# Allegro board ANALYSIS_20170306_1.brd
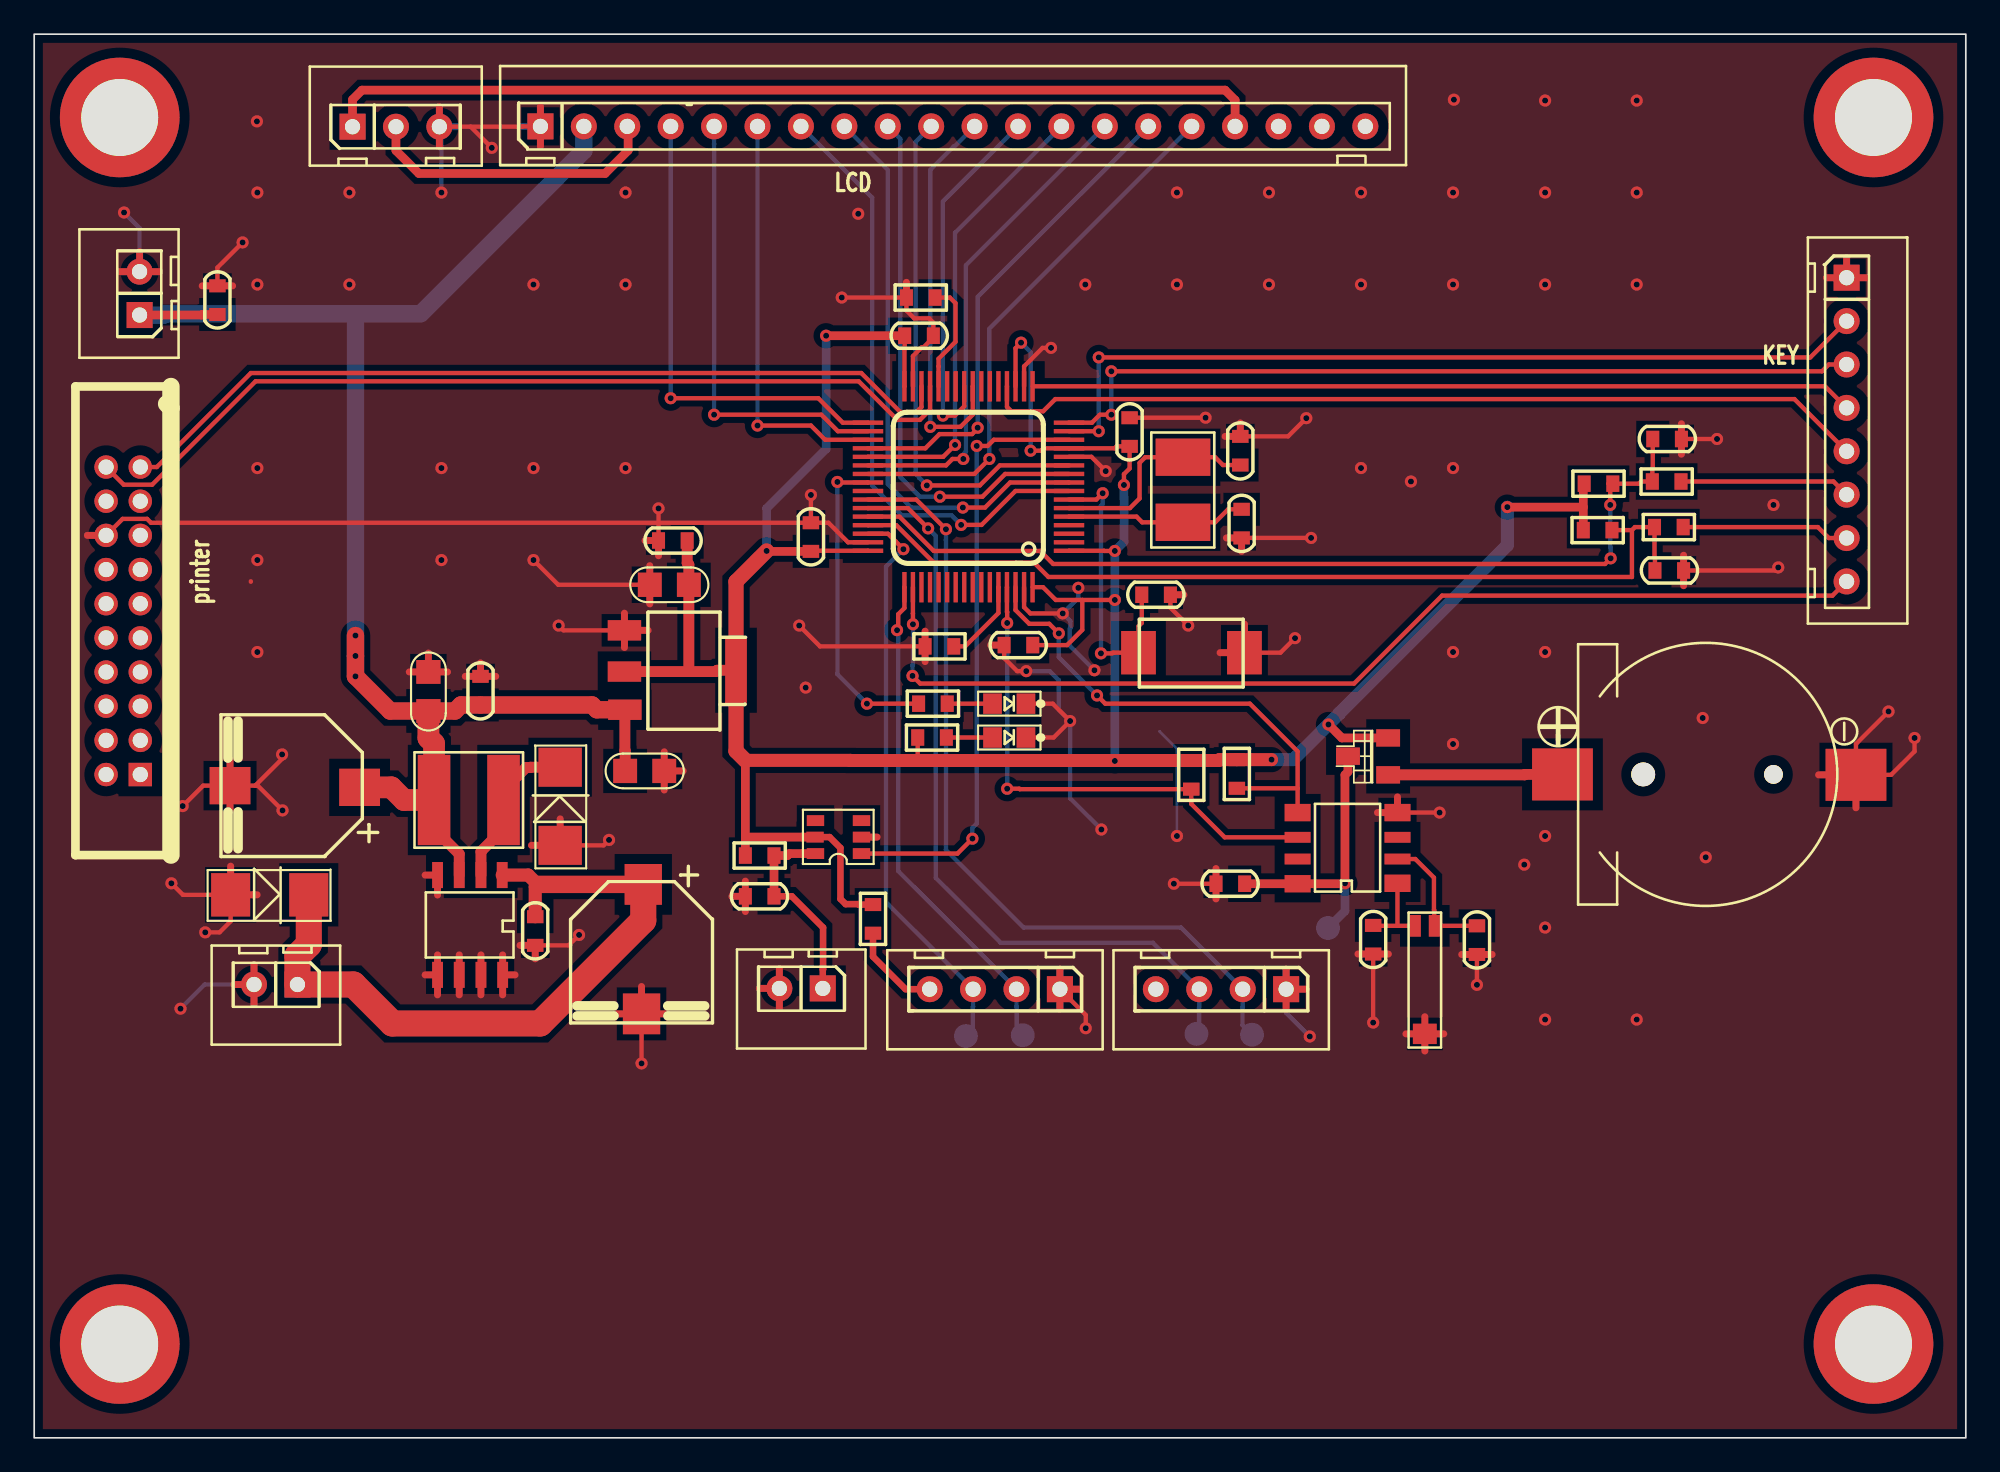
[diagram p0: board, top side]
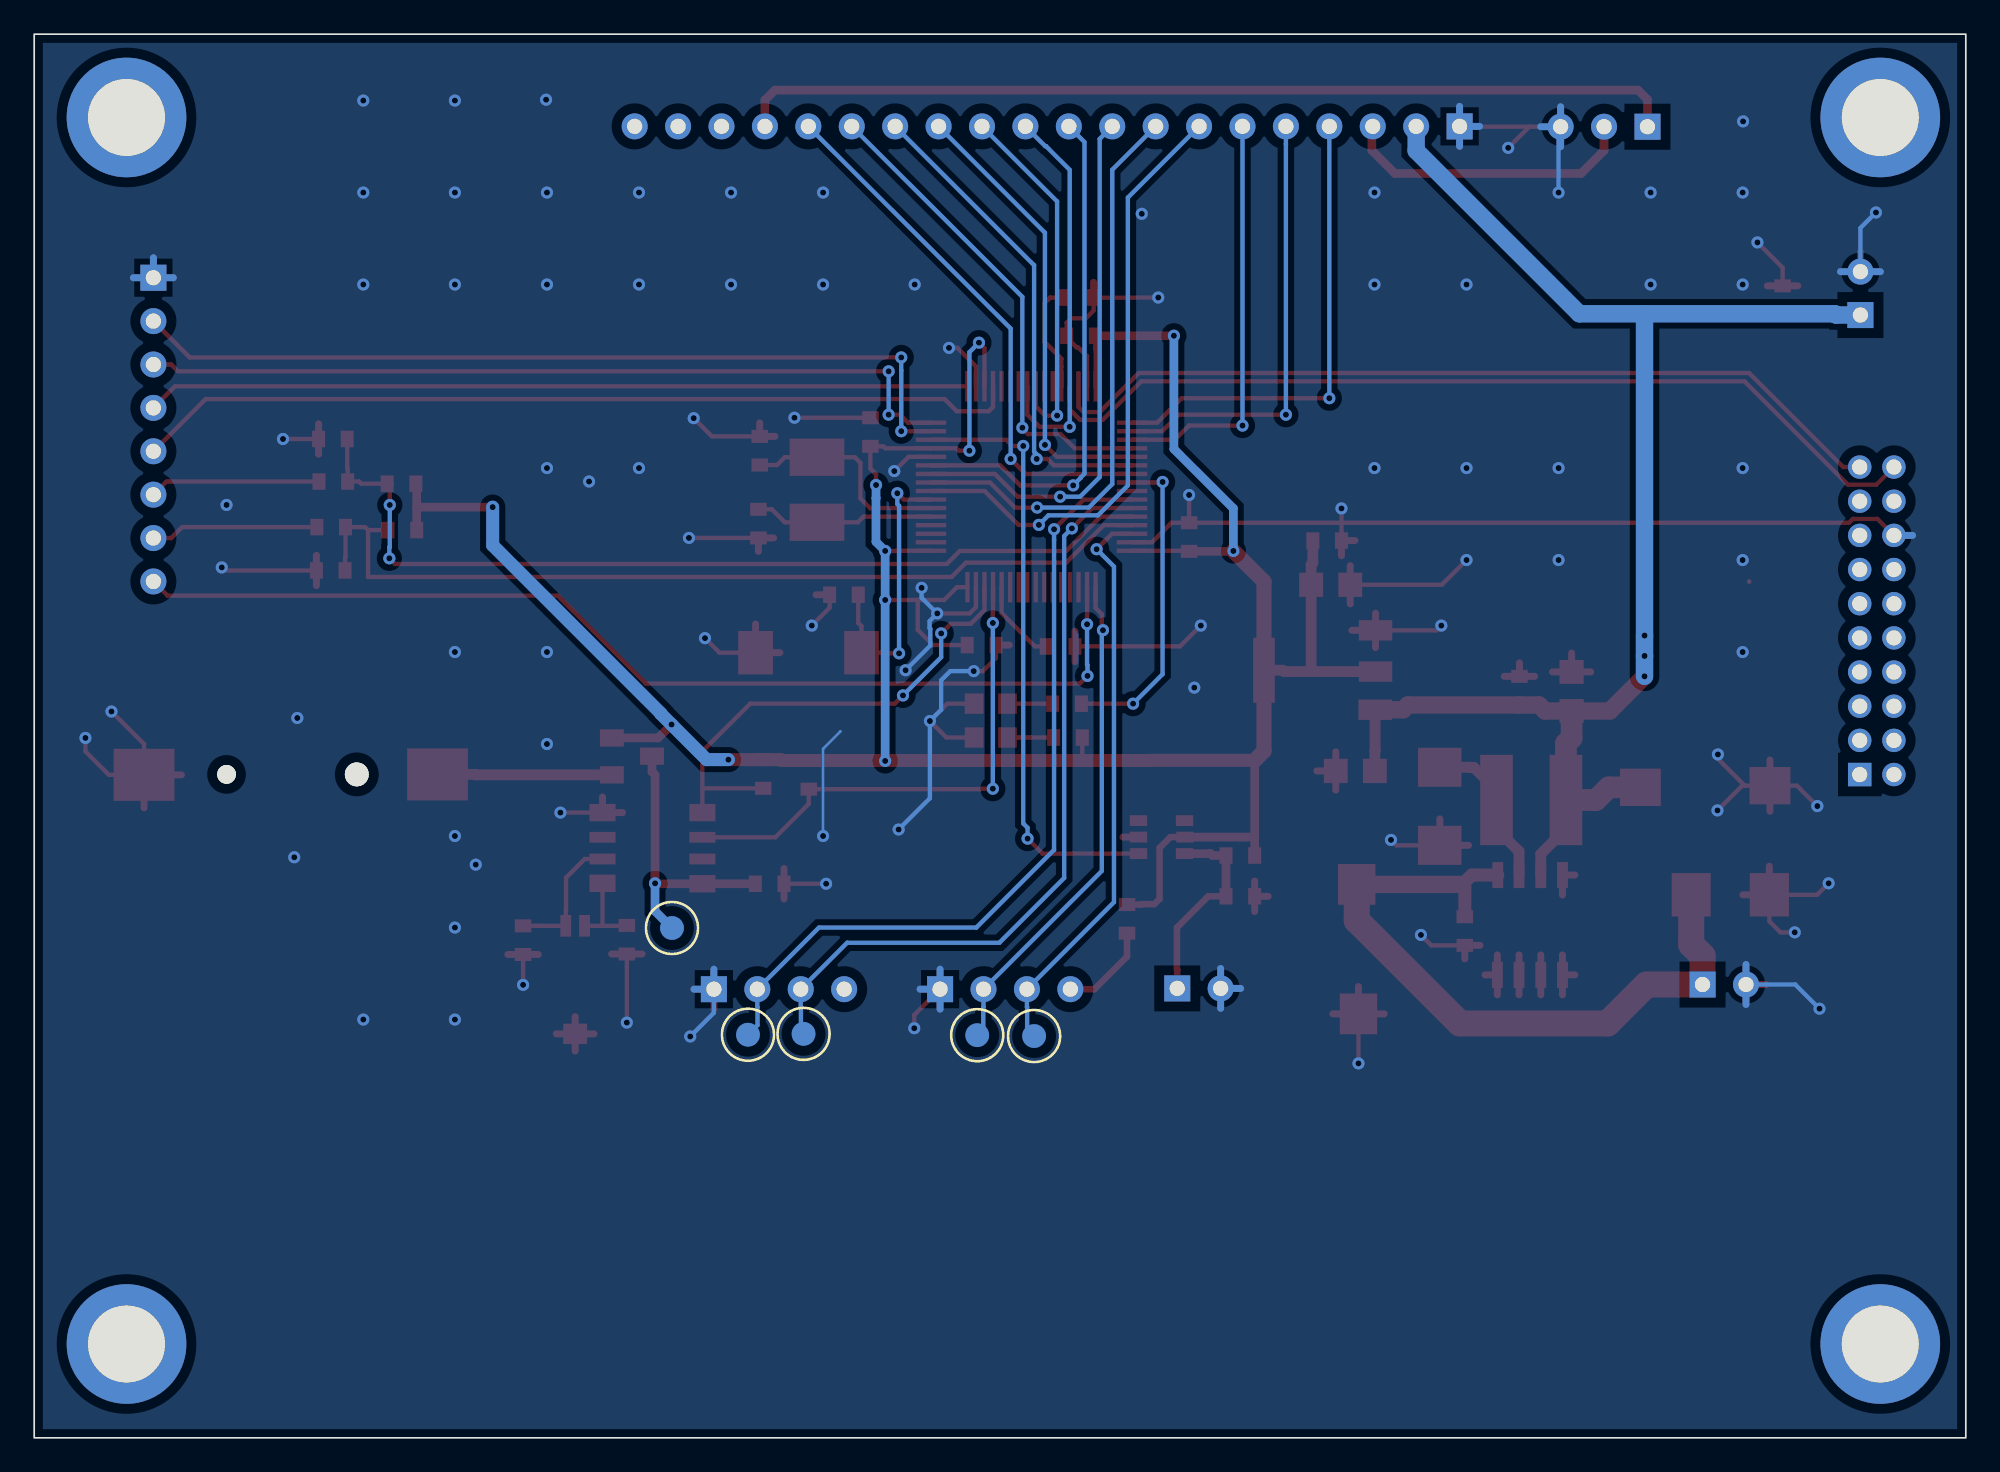
[diagram p1: board, bottom side, seen from below]

Outline 113 x 82.17 mm; copper layers: TOP, BOTTOM. Coordinates in mm from the lower left corner of the outline.
Outline path: rectangle 0,0 113,82.17

## Placement (name value [footprint] x y rotation side)
C1  0.1uF  [C0603]  51.77 64.52 0 top
C2  0.1uF  [C0603]  64.08 58.88 90 top
C3  0.1uF  [C0603]  45.44 52.73 90 top
C4  0.1uF  [C0603]  10.72 66.6 90 top
C5  0.1uF  [C0603]  42.44 31.7 180 top
C6  0.1uF  [C0603]  57.58 46.41 180 top
C7  15pF  [C0603]  70.56 57.78 270 top
C8  15pF  [C0603]  70.64 53.52 90 top
C9  0.1uF  [C0603]  65.63 49.35 180 top
C10  0.1uF  [C0603]  95.66 50.77 0 top
C11  0.1uF  [C0603]  95.53 58.47 0 top
C12  0.1uF  [C0603]  69.98 32.44 180 top
C13  5pF  [C0603]  84.4 29.13 90 top
C14  5pF  [C0603]  78.33 29.16 90 top
C15  220uf/35V  [CAP_SMD_8X10D5]  40.58 30.58 270 top
C16  0.1uF  [C0603]  29.31 29.67 90 top
C17  220uf/35V  [CAP_SMD_8X10D5]  17.22 33.13 180 top
C18  0.1uF  [C0603]  26.11 43.74 270 top
C19  10uF  [C0805]  23.06 43.69 270 top
C20  10uF  [C0805]  37.16 49.94 0 top
C21  10uF  [C0805]  35.72 39.04 180 top
C22  0.1uF  [C0603]  37.36 52.53 0 top
D1  BAT54C  [SOT23-3]  78.04 39.9 0 top
D2  SMBJ12A  [SMA]  13.78 31.79 180 top
D3  SS34  [SMA]  30.77 36.97 270 top
H1  NC/mechanical _pad  [HOLE_4D5MM]  5 5.49 0 top
H2  NC/mechanical _pad  [HOLE_4D5MM]  5 77.29 0 top
H3  NC/mechanical _pad  [HOLE_4D5MM]  107.6 77.29 0 top
H4  NC/mechanical _pad  [HOLE_4D5MM]  107.6 5.49 0 top
J3  -  [XH-2A]  6.17 65.73 90 top
J4  HEADER 20X2  [HEADER10X2_2MMP]  5.21 47.83 180 top
J5  HEADER 2  [XH-2A]  46.13 26.31 180 top
J8  HEADER 8  [XH-8A]  106.04 67.92 270 top
J9  LCD  [XH-20A]  32.56 63.52 0 top
JP_1  -  [XH-2A]  15.4 26.54 180 top
JP_SWD1  -  [XH-4A]  60.01 26.26 180 top
JS_BAT1  BAT  [CR1220_SOCKET_V1]  97.69 38.84 270 top
JS_USART1  NC/XH-4A  [XH-4A]  73.24 26.26 180 top
KS_REST  KEY_3x6x2d5_2p_SMD  [KEY_3X6X2D5_2P_SMD]  67.65 46.14 0 top
L1  47UH  [CD54]  25.43 37.34 90 top
LED0  LED  [LED0603]  57.05 41 180 top
LED1  LED  [LED0603]  57.05 42.98 180 top
NOREF  -  []  5 5.49 0 top
NOREF#2  -  []  107.6 5.49 90 top
NOREF#3  -  []  5 5.49 90 top
NOREF#4  -  []  5 77.29 0 top
R1  220K  [R0603]  42.44 34.09 180 top
R2  10K  [R0603]  91.47 53.14 180 top
R3  10K  [R0603]  91.52 55.85 180 top
R4  10K  [R0603]  52.96 46.33 0 top
R5  10K  [R0603]  51.87 66.75 0 top
R6  10K  [R0603]  95.5 55.98 180 top
R7  10K  [R0603]  95.63 53.31 180 top
R8  10R  [R0603]  49.07 30.38 90 top
R9  10k  [XH-3A]  18.62 76.75 0 top
R10  10K  [R0603]  67.69 38.81 270 top
R11  10K  [R0603]  70.36 38.86 270 top
R13  3.3K  [R0603]  52.53 41 180 top
R14  3.3K  [R0603]  52.58 42.98 180 top
T1  NC/TEST  [TEST_55C_SMD]  54.51 23.52 180 bottom
T2  NC/TEST  [TEST_55C_SMD]  57.84 23.57 180 bottom
T3  NC/TEST  [TEST_55C_SMD]  75.69 29.85 180 bottom
T4  NC/TEST  [TEST_55C_SMD]  68 23.65 180 bottom
T5  NC/TEST  [TEST_55C_SMD]  71.25 23.6 180 bottom
U1  USBLC6-2SC6  [SOT23-6]  47.05 35.17 90 top
U2  STM32F103RB  [LQFP64]  54.66 55.68 180 top
U3  PCF8563T  [SOP8]  79.5 32.61 90 top
U4  XL1509-5.0  [SOIC8]  25.5 30.02 180 top
U5  LM1117-3.3  [SOT-223]  34.58 44.93 270 top
Y1  8M  [CY5032_2P]  67.21 55.5 90 top
Y2  32.768KHz  [MC_146]  81.36 26.8 270 top

## Library data of the parts
C1-C22 = C
D1 = BAT54C
D2 D3 = DIODE
H1-H4 = PAD
J3 J5 = HEADER 2
J4 = HEADER 10X2_2
J8 = HEADER 10_0
J9 = HEADER 22_3
JP_1 = header_3d5_6
JP_SWD1 JS_USART1 = HEADER 4
JS_BAT1 = BATT
KS_REST = SW PUSHBUTTON_0
L1 = INDUCTOR_0
LED0 LED1 = LED0603
R1-R8 R10 R11 R13 R14 = R
R9 = R_var_0
T1-T5 = TESTPONT
U1 = USB_MINI_SOCKET_5
U2 = STM32F103
U3 = PCF8563
U4 = XL1509
U5 = 1117
Y1 = CRYSTAL
Y2 = MC_146

## Footprints (pads in the part's own frame, mm; a bottom-side part is the same pattern mirrored in y, then rotated)
C0603
  rect 0.762x0.965 smd: 1(-0.838,0) 2(0.838,0)
C0805
  rect 1.397x1.422 smd: 1(-1.143,0) 2(1.143,0)
CAP_SMD_8X10D5
  rect 2.388x2.184 smd: 1(-1.82,-4.95) 2(5.76,-5.05)
CD54
  rect 5.283x1.905 smd: 1(0,2.032) 2(0,-2.032)
CR1220_SOCKET_V1
  round 1.397 hole 1.397 unplated: (0,-3.556)
  rect 3.048x3.556 smd: 1(0,-8.28) 2(0.025,8.89)
  round 1.092 hole 1.092: 3(0,4.064)
CY5032_2P
  rect 2.184x3.2 smd: 1(-1.905,0) 2(1.905,0)
HEADER10X2_2MMP
  rect 1.372x1.372 hole 0.889: 1(-1,9)
  round 1.372 hole 0.889: 2(1,9) 3(-1,7) 4(1,7) 5(-1,5) 6(1,5) 7(-1,3) 8(1,3) 9(-1,1) 10(1,1) 11(-1,-1) 12(1,-1) 13(-1,-3) 14(1,-3) 15(-1,-5) 16(1,-5) 17(-1,-7) 18(1,-7) 19(-1,-9) 20(1,-9)
HOLE_4D5MM
  round 7 hole 4.5: 1(0,0)
KEY_3X6X2D5_2P_SMD
  rect 2.032x2.54 smd: 1(-3.048,-0.178) 2(3.15,-0.178)
LED0603
  rect 1.092x1.194 smd: 1(0.991,0) 2(-0.965,0)
LQFP64
  rect 1.778x0.254 smd: 1(-5.88,3.749) 2(-5.88,3.251) 3(-5.88,2.751) 4(-5.88,2.25) 5(-5.88,1.75) 6(-5.88,1.25) 7(-5.88,0.749) 8(-5.88,0.249) 9(-5.88,-0.249) 10(-5.88,-0.749) 11(-5.88,-1.25) 12(-5.88,-1.75) 13(-5.88,-2.25) 14(-5.88,-2.751) 15(-5.88,-3.251) 16(-5.88,-3.749) 33(5.88,-3.749) 34(5.88,-3.251) 35(5.88,-2.751) 36(5.88,-2.25) 37(5.88,-1.75) 38(5.88,-1.25) 39(5.88,-0.749) 40(5.88,-0.249) 41(5.88,0.249) 42(5.88,0.749) 43(5.88,1.25) 44(5.88,1.75) 45(5.88,2.25) 46(5.88,2.751) 47(5.88,3.251) 48(5.88,3.749)
  rect 0.254x1.778 smd: 17(-3.749,-5.88) 18(-3.251,-5.88) 19(-2.751,-5.88) 20(-2.25,-5.88) 21(-1.75,-5.88) 22(-1.25,-5.88) 23(-0.749,-5.88) 24(-0.249,-5.88) 25(0.249,-5.88) 26(0.749,-5.88) 27(1.25,-5.88) 28(1.75,-5.88) 29(2.25,-5.88) 30(2.751,-5.88) 31(3.251,-5.88) 32(3.749,-5.88) 49(3.749,5.88) 50(3.251,5.88) 51(2.751,5.88) 52(2.25,5.88) 53(1.75,5.88) 54(1.25,5.88) 55(0.749,5.88) 56(0.249,5.88) 57(-0.249,5.88) 58(-0.749,5.88) 59(-1.25,5.88) 60(-1.75,5.88) 61(-2.25,5.88) 62(-2.751,5.88) 63(-3.251,5.88) 64(-3.749,5.88)
MC_146
  rect 1.27x0.635 smd: 1(-3.173,0.55) 2(-3.173,-0.55)
  rect 1.194x1.397 smd: 3(3.15,0)
R0603
  rect 0.762x0.965 smd: 1(-0.838,0) 2(0.838,0)
SMA
  rect 2.286x2.54 smd: 1(2.286,0) 2(-2.286,0)
SOIC8
  rect 0.635x1.524 smd: 1(-1.88,-2.921) 2(-0.635,-2.921) 3(0.635,-2.921) 4(1.905,-2.921) 5(1.905,2.921) 6(0.635,2.921) 7(-0.635,2.921) 8(-1.905,2.921)
SOP8
  rect 1.016x1.524 smd: 1(-0.152,-0.254) 4(3.988,-0.254) 5(3.988,5.588) 8(-0.178,5.588)
  rect 0.635x1.524 smd: 2(1.27,-0.254) 3(2.54,-0.254) 6(2.54,5.588) 7(1.27,5.588)
SOT23-3
  rect 1.397x1.016 smd: 1(1.168,-1.092) 2(1.168,1.067) 3(-1.181,0)
SOT23-6
  rect 0.635x1.016 smd: 1(-0.965,-1.346) 2(0,-1.346) 3(0.965,-1.346) 4(0.965,1.346) 5(0,1.372) 6(-0.965,1.346)
SOT-223
  rect 1.194x1.956 smd: 1(-2.337,-0.051) 2(0.076,-0.051) 3(2.311,-0.025)
  rect 3.81x1.27 smd: 4(0,6.477)
TEST_55C_SMD
  round 1.397 smd: 1(0,0)
XH-2A
  rect 1.524x1.524 hole 0.889: 1(0,0)
  round 1.524 hole 0.889: 2(2.54,0)
XH-3A
  rect 1.524x1.524 hole 0.889: 1(0,0)
  round 1.524 hole 0.889: 2(2.54,0) 3(5.08,0)
XH-4A
  rect 1.524x1.524 hole 0.889: 1(0,0)
  round 1.524 hole 0.889: 2(2.54,0) 3(5.08,0) 4(7.62,0)
XH-8A
  rect 1.524x1.524 hole 0.889: 1(0.005,-0.013)
  round 1.524 hole 0.889: 2(2.545,-0.013) 3(5.085,-0.013) 4(7.625,-0.013) 5(10.165,-0.013) 6(12.705,-0.013) 7(15.245,-0.013) 8(17.785,-0.013)
XH-20A
  rect 1.524x1.524 hole 0.889: 1(-2.942,13.25)
  round 1.524 hole 0.889: 2(-0.402,13.25) 3(2.138,13.25) 4(4.678,13.25) 5(7.218,13.25) 6(9.758,13.25) 7(12.298,13.25) 8(14.838,13.25) 9(17.378,13.25) 10(19.918,13.25) 11(22.458,13.25) 12(24.998,13.25) 13(27.538,13.25) 14(30.078,13.25) 15(32.618,13.25) 16(35.158,13.25) 17(37.698,13.25) 18(40.238,13.25) 19(42.778,13.25) 20(45.318,13.25)

## Nets
GND: C1.2 C2.2 C3.2 C4.2 C5.2 C6.2 C7.1 C8.1 C9.1 C10.2 C11.2 C12.2 C13.1 C14.1 C15.2 C16.1 C17.2 C18.1 C19.1 C20.1 C21.1 C22.1 D2.1 D3.1 J3.2 J4.16(GND) J5.2 J8.1 J9.1(VSS) JP_1.2 JP_SWD1.1 JS_BAT1.2(-) JS_USART1.1 KS_REST.2 LED0.2(CATHODE) LED1.2(CATHODE) R4.1 R5.1 R9.3 U1.2(GND) U2.12(VSSA) U2.18(VSS_4) U2.31(VSS_1) U2.47(VSS_2) U2.63(VSS_3) U3.4(VSS) U4.4(EN) U4.5(GND1) U4.6(GND2) U4.7(GND3) U4.8(GND4) U5.1 Y2.3(GND)
VCC_5V: C4.1 C17.1 C18.2 C19.2 C21.2 J3.1 J9.2(VDD) L1.1 U4.3(FB) U5.3(IN)
VCC_9V: C15.1 C16.2 D2.2 JP_1.1 U4.1(VIN)
VDD_3V3: C1.1 C2.1 C3.1 C6.1 C20.2 C22.2 D1.2(C2) R1.2 R2.2 R3.2 R8.2 R10.1 R11.1 R13.2 U1.5(VBUS) U2.1(VBAT) U2.13(VDDA) U2.19(VDD_4) U2.32(VDD_1) U2.48(VDD_2) U2.64(VDD_3) U5.2(OUT) U5.4
/CS1: J9.15(CS) U2.36(PB15/TIM1_CH3N/SPI2_MOSI)
/RD: J9.6(RD) U2.35(PB14/TIM1_CH2N/SPI2_MISO)
/RST: J9.16(REST) U2.39(PC8/TIM3_CH3)
/WR: J9.5(WR) U2.34(PB13/TIM1_CH1N/SPI2_SCK)
BOOT0: R4.2 U2.60(BOOT0)
BOOT1: R5.2 U2.28(PB2/BOOT1)
DB0: J9.7(D0) U2.8(PC0/ADC12_IN10)
DB1: J9.8(D1) U2.9(PC1/ADC12_IN11)
DB2: J9.9(D2) U2.10(PC2/ADC12_IN12)
DB3: J9.10(D3) U2.11(PC3/ADC12_IN13)
DB4: J9.11(D4) U2.24(PC4/ADC12_IN14)
DB5: J9.12(D5) U2.25(PC5/ADC12_IN15)
DB6: J9.13(D6) U2.37(PC6/TIM3_CH1)
DB7: J9.14(D7) U2.38(PC7/TIM3_CH2)
EC11_A: C11.1 R3.1 R6.2 U2.44(PA11/USART1_CTS/CANRX/TIM1_CH4/)
EC11_B: C10.1 R2.1 R7.2 U2.45(PA12/USART1_RTS/CANTX/TIM1_ETR/)
EC11_C: J8.8 U2.50(PA15/JTDI/TIM2_CH1_ETR/SPI1_NSS)
I2C1_SCL: R10.2 U2.61(PB8/I2C1_SCL/CANRX) U3.6(SCL)
I2C1_SDA: R11.2 U2.62(PB9/I2C1_SDA/CANTX) U3.5(SDA)
KEY_1: J8.2 U2.15(PA1/USART2_RTS/ADC12_IN1/TIM2_C)
KEY_2: J8.3 U2.16(PA2/USART2_TX/ADC12_IN2/TIM2_CH)
KEY_3: J8.4 U2.17(PA3/USART2_RX/ADC12_IN3/TIM2_CH)
KEY_4: J8.5 U2.20(PA4/SPI1_NSS/USART2_CK/ADC12_IN)
PC9_LED0: R14.2 U2.40(PC9/TIM3_CH4)
RS: J9.4(A0) U2.33(PB12/TIM1_BKIN/SPI2_NSS)
STM32_REST: C9.2 KS_REST.1 U2.7(NRST)
SWCLK: JP_SWD1.2 T2.1 U2.49(PA14/JTCK/SWCLK)
SWDIO: JP_SWD1.3 T1.1 U2.46(PA13/JTMS/SWDIO)
USART1_RX_PA10: JS_USART1.3 T4.1 U2.43(PA10/USART1_RX/TIM1_CH3)
USART1_TX_PA9: JS_USART1.2 T5.1 U2.42(PA9/USART1_TX/TIM1_CH2)
USART3_RXD: J4.19(TXD) U2.30(PB11/TIM2_CH4/USART3_RX)
USART3_TXD: J4.20(RXD) U2.29(PB10/TIM2_CH3/USART3_TX)
N201627: C12.1 D1.3(A) T3.1 U3.8(VDD)
N201649: C14.2 U3.1(OSCI) Y2.2
N202031: JP_SWD1.4 R8.1
N202175: C7.2 U2.6(PD1 OSC_OUT/CANTX) Y1.2
N202187: C8.2 U2.5(PD0 OSC_IN/CANRX) Y1.1
N202733: D1.1(C1) JS_BAT1.1(+)
N203157: C13.2 U3.2(OSCO) Y2.1
N208876: D3.2 L1.2 U4.2(OUTPUT)
N211508: U1.1(I/O1) U2.14(PA0-WKUP/USART2_CTS/ADC12_IN0/T)
N214712: C5.1 J5.1 R1.1 U1.6(I/O1X)
N217465: J8.7 R7.1
N217476: J8.6 R6.1
N261648: J9.17(VEE) R9.1
N261718: J9.3(V0) R9.2
N265241: LED1.1(ANODE) R14.1
N2654610: LED0.1(ANODE) R13.1

Pads without a net: H1 1; H2 1; H3 1; H4 1; J4 1 2 3 4 5 6 7 8 9 10 11 12 13 14 15 17 18; J9 18 19 20; JS_BAT1 3; JS_USART1 4; U1 3 4; U2 2 3 4 21 22 23 26 27 41 51 52 53 54 55 56 57 58 59; U3 3 7

## Via types
v1: diameter 0.711, hole 0.356, TOP to BOTTOM, 140 vias

## Routing (per net, layer and track width the routed paths; a pad name or vN(x,y) marks a point on that pad's centre or on a via; arc(x,y) is an arc through that point)
GND: length 354.7
  TOP w0.254: v1(44.75,47.55) 45.97,46.33 R4.1 ; C22.1 v1(36.53,54.41) ; J9.1 28.57,76.77 28.56,76.75 25.53,76.75 ; v1(108.48,42.52) 106.58,40.61 JS_BAT1.2 108.64,38.81 110.01,40.18 v1(110.01,40.97) ; C6.2 56.74,45.64 57.51,44.88 v1(58.04,44.88) ; v1(102.03,50.95) 101.85,50.77 C10.2 ; v1(61.52,23.98) 61.52,24.75 JP_SWD1.1 ; LED1.2 59.59,42.98 v1(60.6,41.96) ; C9.1 66.47,48.59 v1(67.51,47.55) ; J4.16 5.17,53.79 6.61,53.79 6.83,53.57 C3.2 ; C15.2 v1(35.53,21.92) ; v1(60.17,48.26) 58.28,48.26 57.91,48.63 U2.63 ; C3.2 46.47,53.57 47.61,52.42 U2.47 ; C3.2 v1(45.44,55.19) ; U5.1 30.96,47.27 v1(30.68,47.55) ; v1(59.49,63.8) 58.99,63.8 57.91,62.72 U2.18 ; C16.1 31.27,28.83 v1(31.88,29.44) ; v1(8.69,36.98) 9.88,38.18 C17.2 12.93,38.18 ; v1(62.69,56.59) 61.85,57.43 U2.12 ; 12.93,38.18 13.08,38.18 v1(14.53,36.73) ; 12.93,38.18 14.5,39.75 v1(14.5,40) ; LED0.2 59.64,41 v1(60.6,41.96) ; v1(73.76,46.81) 72.91,45.96 KS_REST.2 ; v1(29.21,51.38) 30.66,49.94 C20.1 ; 12.67,50.14 12.67,50.11 ; v1(8.03,32.46) 8.7,31.79 D2.1 11.49,30.24 10.85,29.59 v1(10.01,29.59) ; D3.1 33.31,34.68 v1(33.63,35) ; v1(60.6,41.96) 60.63,41.96 ; 25.53,76.75 v1(26.77,75.51) ; 25.53,76.75 R9.3 ; C8.1 v1(74.7,52.68) ; C11.2 v1(98.45,58.47) ; C14.1 v1(78.33,24.31) ; C2.2 v1(68.53,59.72) ; C7.1 73.36,58.62 v1(74.42,59.69) ; v1(12.19,69.98) 10.72,68.5 C4.2 ; C13.1 v1(84.4,26.52) ; C12.2 v1(66.67,32.44) ; U3.4 v1(82.22,36.6) ; U2.31 51.41,63.32 51.92,63.84 52.02,63.84 52.6,64.41 C1.2 52.6,65.28 52.35,65.53 51.49,65.53 51.03,65.99 R5.1 v1(47.24,66.75)
  TOP w0.406: 36.53,51.64 C22.1 35.74,52.53 ; 29.62,75.6 J9.1 29.62,77.94 ; 23.6,25.93 U4.5 ; U4.5 22.87,27.1 ; U4.5 23.6,28.27 ; 104.86,67.91 J8.1 ; J8.1 107.2,67.91 ; J8.1 106.03,69.08 ; 12.86,25.37 JP_1.2 ; JP_1.2 11.69,26.54 ; JP_1.2 12.86,27.71 ; 79.76,37.52 U3.4 78.59,36.6 ; 69.67,58.62 C7.1 70.56,59.41 ; 23.7,75.58 R9.3 23.7,77.92 ; C15.2 37.03,24.82 ; C15.2 35.53,26.42 ; C15.2 34.03,24.82 ; 69.14,31.55 C12.2 69.14,33.32 ; J3.2 6.17,69.44 ; J3.2 7.33,68.27 ; J3.2 5,68.27 ; 3.11,52.83 J4.16 ; 52.12,47.22 R4.1 52.12,45.44 ; 96.37,57.58 C11.2 96.37,59.36 ; 69.75,52.68 C8.1 70.64,51.89 ; C21.1 37.96,39.04 ; C21.1 36.86,37.92 ; C21.1 36.86,40.16 ; 25.22,44.58 C18.1 ; C18.1 27,44.58 ; C18.1 26.11,45.36 ; 69.38,45.96 KS_REST.2 70.8,47.64 ; JS_USART1.1 74.41,26.26 ; JS_USART1.1 73.24,25.1 ; JS_USART1.1 73.24,27.43 ; 23.6,31.78 U4.4 22.87,32.94 ; Y2.3 82.46,23.65 ; Y2.3 81.36,22.64 ; Y2.3 80.25,23.65 ; Y2.3 81.36,24.65 ; 83.52,28.3 C13.1 85.29,28.3 ; 11.46,39.68 C17.2 11.46,36.68 ; 96.49,49.89 C10.2 96.49,51.66 ; U1.2 49.31,35.17 ; 40.82,31.7 C5.2 ; C5.2 41.61,32.59 ; C5.2 41.61,30.81 ; C9.1 67.26,49.35 ; 11.61,67.44 C4.2 9.83,67.44 ; JP_SWD1.1 61.18,26.26 ; JP_SWD1.1 60.01,25.1 ; JP_SWD1.1 60.01,27.43 ; 28.42,28.83 C16.1 29.31,28.04 ; 26.14,25.93 U4.7 26.14,28.27 ; 106.58,36.88 JS_BAT1.2 104.39,38.81 ; 34.53,46.27 U5.1 ; U5.1 35.92,47.27 ; U5.1 34.53,48.27 ; 24.87,28.27 U4.6 24.87,25.93 ; U4.8 28.13,27.1 ; U4.8 27.41,28.27 ; U4.8 27.41,25.93 ; 36.01,51.05 C20.1 36.01,48.82 ; R5.1 51.03,67.64 ; 42.43,26.31 J5.2 ; J5.2 43.59,27.48 ; J5.2 43.59,25.14 ; 21.95,44.83 C19.1 ; C19.1 23.06,45.94 ; C19.1 24.18,44.83 ; 11.49,33.46 D2.1 13.04,31.79 ; 79.22,28.32 C14.1 77.44,28.32 ; 30.77,36.23 D3.1 29.1,34.68 ; 55.96,46.41 C6.2
  BOTTOM w0.152: 65.86,41.35 65.84,41.35 66.85,40.34 v1(66.85,35.23)
  BOTTOM w0.254: v1(5.26,71.73) 6.17,70.82 J3.2 ; v1(23.83,72.9) 23.83,76.63 R9.3 ; v1(62.43,35.61) 60.6,37.44 v1(60.6,41.96) 59.94,42.62 59.94,44.35 59.41,44.88 v1(58.04,44.88) ; JP_1.2 9.98,26.54 v1(8.56,25.12) ; v1(62.03,44.93) 60.58,46.38 60.58,47.35 60.62,47.4 60.62,47.81 v1(60.17,48.26) 61.09,49.17 v1(61.09,49.76) ; JS_USART1.1 73.24,24.88 v1(74.63,23.5)
  BOTTOM w0.406: R9.3 24.87,76.75 ; R9.3 23.7,75.58 ; R9.3 23.7,77.92 ; J8.1 106.03,69.08 ; J8.1 104.86,67.91 ; J8.1 107.2,67.91 ; 5,68.27 J3.2 7.33,68.27 ; 42.43,26.31 J5.2 ; J5.2 43.59,27.48 ; J5.2 43.59,25.14 ; 3.11,52.83 J4.16 ; 60.01,25.1 JP_SWD1.1 ; JP_SWD1.1 60.01,27.43 ; JP_SWD1.1 61.18,26.26 ; 28.45,76.77 J9.1 ; J9.1 29.62,75.6 ; J9.1 29.62,77.94 ; 12.86,25.37 JP_1.2 12.86,27.71 ; 74.41,26.26 JS_USART1.1 73.24,27.43
  vias: v1(13.03,77.06) v1(13.06,72.9) v1(13.06,67.51) v1(13.06,56.77) v1(13.06,51.38) v1(13.06,46) v1(18.44,72.9) v1(18.44,67.51) v1(23.83,56.77) v1(23.83,51.38) v1(29.21,67.51) v1(29.21,56.77) v1(34.59,72.9) v1(34.59,67.51) v1(34.59,56.77) v1(45.14,43.92) v1(48.21,71.65) v1(61.49,67.51) v1(66.85,72.9) v1(66.85,67.51) v1(72.24,72.9) v1(72.24,67.51) v1(77.62,72.9) v1(77.62,67.51) v1(77.62,56.77) v1(80.54,55.98) v1(83.01,72.9) v1(83.01,67.51) v1(83.01,56.77) v1(83.01,46) v1(83.01,40.61) v1(83.06,78.33) v1(87.17,33.55) v1(88.39,78.28) v1(88.39,72.9) v1(88.39,67.51) v1(88.39,46) v1(88.39,35.23) v1(88.39,29.87) v1(88.39,24.49) v1(93.75,78.28) v1(93.75,72.9) v1(93.75,67.51) v1(93.75,24.49) v1(97.61,42.14) v1(97.79,33.99) v1(101.75,54.61)
VCC_5V: length 95
  TOP w0.508: J3.1 9.8,65.73 9.83,65.76 C4.1
  TOP w0.635: L1.1 23.39,35.65 24.87,34.18 U4.3 ; U5.3 34.56,40.24 34.57,40.22 C21.2
  TOP w1.016: U5.3 32.92,42.62 32.64,42.9 C18.2 24.97,42.9 24.62,42.55 C19.2 20.82,42.55 v1(18.8,44.58) v1(18.8,45.77) v1(18.8,46.96)
  TOP w1.27: C19.2 23.06,40.97 23.39,40.64 L1.1 21.63,37.34 20.89,38.08 C17.1
  BOTTOM w1.016: 18.8,65.8 22.61,65.8 32.16,75.35 J9.2 ; 18.8,65.8 7.66,65.8 7.59,65.73 J3.1 ; 18.8,65.8 v1(18.8,46.96) v1(18.8,45.77) v1(18.8,44.58)
VCC_9V: length 41.7
  TOP w0.762: C16.2 29.31,32.26 29.45,32.4 28.91,32.94 U4.1
  TOP w1.016: C15.1 29.45,32.4
  TOP w1.524: C15.1 35.63,30.29 29.6,24.26 20.95,24.26 18.67,26.54 JP_1.1 15.4,28.21 16.07,28.88 D2.2
VDD_3V3: length 182.7
  TOP w0.254: U2.1 62.58,51.93 62.59,51.92 v1(63.22,51.92) ; U2.64 59.02,49.8 59.77,49.05 61.32,49.05 ; 63.22,39.65 v1(63.22,39.62) ; v1(63.75,55.78) 63.75,56.41 64.08,56.74 C2.1 63.32,58.04 63.21,57.93 U2.13 59.07,57.93 58.93,57.78 v1(58.29,57.78) ; C1.1 50.93,63.75 50.91,63.74 50.91,61.56 U2.32 ; v1(63.22,49.05) 61.32,49.05 ; 61.32,49.05 61.32,47.29 60.43,46.41 C6.1 ; R13.2 51.69,39.65 ; U2.48 45.44,51.93 C3.1 ; v1(57.73,64.11) 57.41,63.79 U2.19
  TOP w0.381: U1.5 46.53,35.17 47.17,34.53 47.17,31.55 47.47,31.24 48.22,31.24 48.25,31.22 R8.2
  TOP w0.508: C3.1 42.87,51.89 v1(42.85,51.92) ; 41.61,35.18 R1.2 ; 41.61,35.18 41.61,39.66 ; 41.61,35.18 41.62,35.17 U1.5 ; v1(75.72,41.76) 76.5,40.97 D1.2 ; R3.2 90.63,55.8 90.63,54.48 ; 90.63,54.48 R2.2 ; 90.63,54.48 v1(86.18,54.48) ; C1.1 v1(46.33,64.52)
  TOP w0.635: U5.4 39.95,44.93 39.88,44.86 38.2,44.86 ; C22.2 38.2,51.22 38.3,51.12 C20.2 38.3,44.95 38.2,44.86 ; U5.2 38.2,44.86
  TOP w0.762: v1(72.39,39.7) R11.1 69.34,39.7 69.29,39.65 R10.1 47.76,39.65 47.75,39.66 41.61,39.66
  TOP w0.889: 41.61,39.66 41.06,40.2 U5.4 41.06,50.13 v1(42.85,51.92)
  BOTTOM w0.254: v1(58.29,57.78) 58.29,63.55 v1(57.73,64.11)
  BOTTOM w0.508: v1(46.33,64.52) 46.33,57.89 42.85,54.41 v1(42.85,51.92) ; v1(63.75,55.78) 63.75,55.02 63.76,55.01 63.76,52.46 v1(63.22,51.92) v1(63.22,49.05) v1(63.22,39.62)
  BOTTOM w0.762: v1(72.39,39.7) 73.66,39.7 v1(75.72,41.76) 76.35,42.39 76.35,42.41 86.18,52.25 v1(86.18,54.48)
/CS1: length 28.7
  TOP w0.254: v1(55.19,59.13) 55.19,59.08 54.87,58.76 52.97,58.76 52.13,57.93 U2.36
  BOTTOM w0.254: J9.15 55.19,66.79 v1(55.19,59.13)
/RD: length 24.3
  TOP w0.254: v1(42.32,59.26) 45.44,59.26 46.27,58.43 U2.35
  BOTTOM w0.254: J9.6 v1(42.32,59.26)
/RST: length 31.8
  TOP w0.254: U2.39 55,56.42 v1(55.88,57.3)
  BOTTOM w0.254: J9.16 55.88,64.93 v1(55.88,57.3)
/WR: length 26.3
  TOP w0.254: v1(39.78,59.89) 46.05,59.89 47.02,58.93 U2.34
  BOTTOM w0.254: J9.5 39.78,75.73 v1(39.78,59.89)
BOOT0: length 4.9
  TOP w0.254: R4.2 54.46,46.33 56.41,48.28 U2.60
BOOT1: length 6.6
  TOP w0.254: R5.2 53.57,66.75 53.9,66.42 53.9,64.16 52.91,63.17 52.91,62.72 52.91,62.72 U2.28
DB0: length 36
  TOP w0.254: v1(54.23,53.44) 55.42,53.44 57.41,55.43 U2.8
  BOTTOM w0.254: v1(54.23,53.44) 53.67,54 50.77,54 49.02,55.75 49.02,72.6 J9.7
DB1: length 33.8
  TOP w0.254: v1(54.33,54.46) 55.63,54.46 57.09,55.92 U2.9
  BOTTOM w0.254: J9.8 49.94,74.23 49.94,55.83 51.31,54.46 v1(54.33,54.46)
DB2: length 31.7
  TOP w0.254: v1(52.98,55.09) 55.47,55.09 56.81,56.42 U2.10
  BOTTOM w0.254: J9.9 50.67,76.03 50.67,56.24 51.82,55.09 v1(52.98,55.09)
DB3: length 30.5
  TOP w0.254: v1(52.22,55.75) 55.32,55.75 56.49,56.93 U2.11
  BOTTOM w0.254: J9.10 51.56,75.86 51.56,56.44 51.77,56.23 51.77,56.2 v1(52.22,55.75)
DB4: length 23.1
  TOP w0.254: U2.24 54.91,59.9 54.19,59.18 v1(52.43,59.18)
  BOTTOM w0.254: J9.11 53.86,75.62 53.81,75.62 52.43,74.23 v1(52.43,59.18)
DB5: length 21.4
  TOP w0.254: U2.25 54.41,60.39 53.87,59.84 v1(53.16,59.84)
  BOTTOM w0.254: J9.12 53.16,72.38 v1(53.16,59.84)
DB6: length 26.6
  TOP w0.254: U2.37 53.18,57.43 v1(53.87,58.12)
  BOTTOM w0.254: J9.13 53.87,70.55 v1(53.87,58.12)
DB7: length 28.6
  TOP w0.254: v1(54.36,57.3) 53.72,57.3 53.34,56.93 U2.38
  BOTTOM w0.254: v1(54.36,57.3) 54.39,57.33 54.39,57.6 54.51,57.73 54.51,68.64 J9.14
EC11_A: length 54.3
  TOP w0.254: v1(92.2,54.61) 92.2,55.75 92.1,55.85 R3.1 93.88,55.85 94.01,55.98 R6.2 94.67,56.74 94.69,56.77 C11.1 ; U2.44 50.62,53.93 52.63,51.92 58.85,51.92 59.61,51.16 91.9,51.16 v1(92.23,51.49)
  BOTTOM w0.254: v1(92.23,51.49) 92.23,52.12 92.2,52.15 v1(92.2,54.61)
EC11_B: length 53.8
  TOP w0.254: C10.1 94.82,51.54 94.79,51.56 R7.2 93.65,53.31 93.47,53.14 ; 93.47,53.14 R2.1 ; 93.47,53.14 93.47,50.4 93.47,50.39 59.33,50.39 58.5,51.23 52.63,51.23 50.44,53.43 U2.45
EC11_C: length 62.5
  TOP w0.254: U2.50 51.41,48.26 51.41,48.26 v1(51.41,47.62) ; v1(51.38,44.6) 51.83,44.15 77.22,44.15 82.36,49.3 105.2,49.3 J8.8
  BOTTOM w0.254: v1(51.38,44.6) 51.38,45.24 51.41,45.26 v1(51.41,47.62)
I2C1_SCL: length 30.5
  TOP w0.254: v1(56.92,38) 57.63,38 57.66,37.97 R10.2 67.69,37.11 69.65,35.15 U3.6 ; v1(56.92,47.7) 56.92,48.34 56.91,48.35 U2.61
  BOTTOM w0.254: v1(56.92,47.7) v1(56.92,38)
I2C1_SDA: length 29.2
  TOP w0.254: U2.62 57.41,48.46 58.22,47.65 59.39,47.65 v1(59.94,47.09) ; v1(62.18,43.46) 62.66,42.98 71.12,42.98 73.91,40.18 73.91,38.02 ; U3.5 73.91,38.02 ; 73.91,38.02 R11.2
  BOTTOM w0.254: v1(59.94,47.09) 59.94,45.69 v1(62.18,43.46)
KEY_1: length 50.7
  TOP w0.254: J8.2 103.91,63.25 v1(62.28,63.25) ; U2.15 v1(62.28,58.93)
  BOTTOM w0.254: v1(62.28,58.93) 62.28,62.49 62.28,62.49 v1(62.28,63.25)
KEY_2: length 48.4
  TOP w0.254: v1(63.02,62.43) 104.59,62.43 104.99,62.83 J8.3 ; v1(63.02,59.89) 62.35,59.89 61.88,59.42 U2.16
  BOTTOM w0.254: v1(63.02,59.89) v1(63.02,62.43)
KEY_3: length 48.1
  TOP w0.254: U2.17 104.77,61.56 J8.4
KEY_4: length 52
  TOP w0.254: J8.5 102.98,60.81 59.74,60.81 59.03,60.1 57.17,60.1 56.91,60.35 U2.20
PC9_LED0: length 18.5
  TOP w0.254: U2.40 47.02,55.92 v1(46.99,55.96) ; v1(48.72,42.98) R14.2
  BOTTOM w0.254: v1(48.72,42.98) 46.99,44.7 v1(46.99,55.96)
RS: length 28
  TOP w0.254: U2.33 47.31,59.42 45.87,60.86 v1(37.24,60.86)
  BOTTOM w0.254: J9.4 v1(37.24,60.86)
STM32_REST: length 17.2
  TOP w0.254: U2.7 62.14,54.93 v1(62.51,55.3) ; v1(62.41,45.92) 63.04,45.92 63.07,45.95 63.14,45.95 63.16,45.96 KS_REST.1 64.6,47.51 64.8,47.7 C9.2
  BOTTOM w0.254: v1(62.51,55.3) 62.51,54.66 62.41,54.56 v1(62.41,45.92)
SWCLK: length 29.5
  TOP w0.254: v1(50.48,47.28) 50.55,47.28 50.55,48.21 50.91,48.57 50.91,49.8 U2.49
  BOTTOM w0.254: T2.1 57.48,23.93 57.48,25.21 57.47,25.22 JP_SWD1.2 50.55,33.19 50.55,47.28 v1(50.48,47.28)
SWDIO: length 33.8
  TOP w0.254: U2.46 49.95,52.92 50.4,52.47 50.4,52.47 v1(50.85,52.02)
  BOTTOM w0.152: T1.1 54.69,23.52 54.91,23.75
  BOTTOM w0.254: 54.91,23.75 54.91,25.21 54.93,25.22 JP_SWD1.3 49.83,31.36 49.83,51 v1(50.85,52.02)
USART1_RX_PA10: length 45.5
  TOP w0.254: v1(52.3,53.24) 51.11,54.43 U2.43
  BOTTOM w0.152: T4.1 68.1,23.65 68.15,23.7
  BOTTOM w0.254: 68.15,23.7 68.15,25.21 68.16,25.22 JS_USART1.3 65.44,28.98 56.54,28.98 52.75,32.77 52.75,52.79 v1(52.3,53.24)
USART1_TX_PA9: length 47.7
  TOP w0.254: v1(53.34,53.19) 51.6,54.93 U2.42
  BOTTOM w0.254: v1(53.34,53.19) 53.34,52.55 53.34,52.55 53.34,34.42 57.89,29.87 67.09,29.87 JS_USART1.2 70.7,25.22 70.69,25.21 70.69,24.16 T5.1
USART3_RXD: length 50.3
  TOP w0.254: J4.19 7.17,56.83 12.68,62.33 48.39,62.33 50.67,60.05 51.61,60.05 51.91,60.34 U2.30
USART3_TXD: length 53.7
  TOP w0.254: U2.29 52.41,60.18 51.82,59.59 50.5,59.59 48.23,61.85 12.95,61.85 6.9,55.79 5.24,55.79 J4.20
N201627: length 16.4
  TOP w0.508: D1.3 76.86,38.99 76.68,38.81 v1(76.68,32.46) 76.66,32.44 U3.8 C12.1
  BOTTOM w0.508: T3.1 76.68,30.84 v1(76.68,32.46)
N201649: length 5
  TOP w0.254: 79.76,29.97 78.36,29.97 C14.2 ; 79.76,29.97 Y2.2 ; 79.76,29.97 U3.1
N202031: length 5.5
  TOP w0.381: JP_SWD1.4 50.98,26.26 49.07,28.17 R8.1
N202175: length 12.7
  TOP w0.254: C7.2 69.55,56.95 69.09,57.4 Y1.2 65,57.4 64.67,57.07 64.67,54.99 64.1,54.43 U2.6
N202187: length 10.6
  TOP w0.254: U2.5 64.49,53.93 64.82,53.59 Y1.1 69.09,53.59 69.85,54.36 C8.2
N202733: length 10.2
  TOP w0.635: JS_BAT1.1 87.22,38.84 87.2,38.81 D1.1
N203157: length 7.9
  TOP w0.254: U3.2 80.8,33.88 81.89,32.79 81.89,30.9 81.91,30.89 Y2.1 83.64,29.97 C13.2
N208876: length 9.4
  TOP w0.635: U4.2 26.14,34.32 26.17,34.35 26.17,34.36 27.46,35.65 L1.2 27.46,37.92 28.78,39.24 29.02,39.24 29.03,39.26 D3.2
N211508: length 35.5
  TOP w0.254: v1(54.89,35.08) 54.01,34.2 U1.1 ; U2.14 56.14,58.43 55.78,58.06 v1(55.14,58.06)
  BOTTOM w0.254: v1(55.14,58.06) 55.14,35.97 54.89,35.71 v1(54.89,35.08)
N214712: length 12.1
  TOP w0.381: J5.1 46.13,27.41 46.15,27.43 46.15,29.87 44.32,31.7 C5.1
  TOP w0.508: U1.6 44.18,34.2 44.07,34.09 R1.1 C5.1
N217465: length 9.8
  TOP w0.254: R7.1 104.35,53.31 104.99,52.67 J8.7
N217476: length 10
  TOP w0.254: R6.1 105.26,55.98 J8.6
N261648: length 55.2
  TOP w0.508: R9.1 18.62,78.34 19.18,78.89 69.67,78.89 70.26,78.31 J9.17
N261718: length 17.5
  TOP w0.508: R9.2 21.16,75.36 22.5,74.02 33.4,74.02 34.75,75.36 34.75,76.72 J9.3
N265241: length 2.6
  TOP w0.254: R14.1 LED1.1
N2654610: length 2.7
  TOP w0.254: LED0.1 R13.1

## Copper pours and planes (outline as drawn; the poured copper is in the pictures)
GND on TOP, BOTTOM: 0.51,0.51 0.51,81.66 112.5,81.66 112.5,0.51

## Text on the board
Ref Des/Silkscreen Top: LCD | KEY | printer
DIMENSION: FIGURE | SIZE | 14.0 | 35.0 | 43.0 | 177.165 | 55.0 | DRILL CHART: TOP to BOTTOM | ALL UNITS ARE IN MILS | PLATED | NON-PLATED | QTY | 140 | 19 | 37 | 1 | 8 | 4
